# Altium PCB 触摸扩展板.PcbDoc
Units mil, origin at the board's own origin, x right, y up, seen from the top; angles counter-clockwise.
Board outline 984.25 x 1043.31 mil, 2 copper layers (Top Layer, Bottom Layer); 13 components, 10 nets, 46 pads, 27 vias.
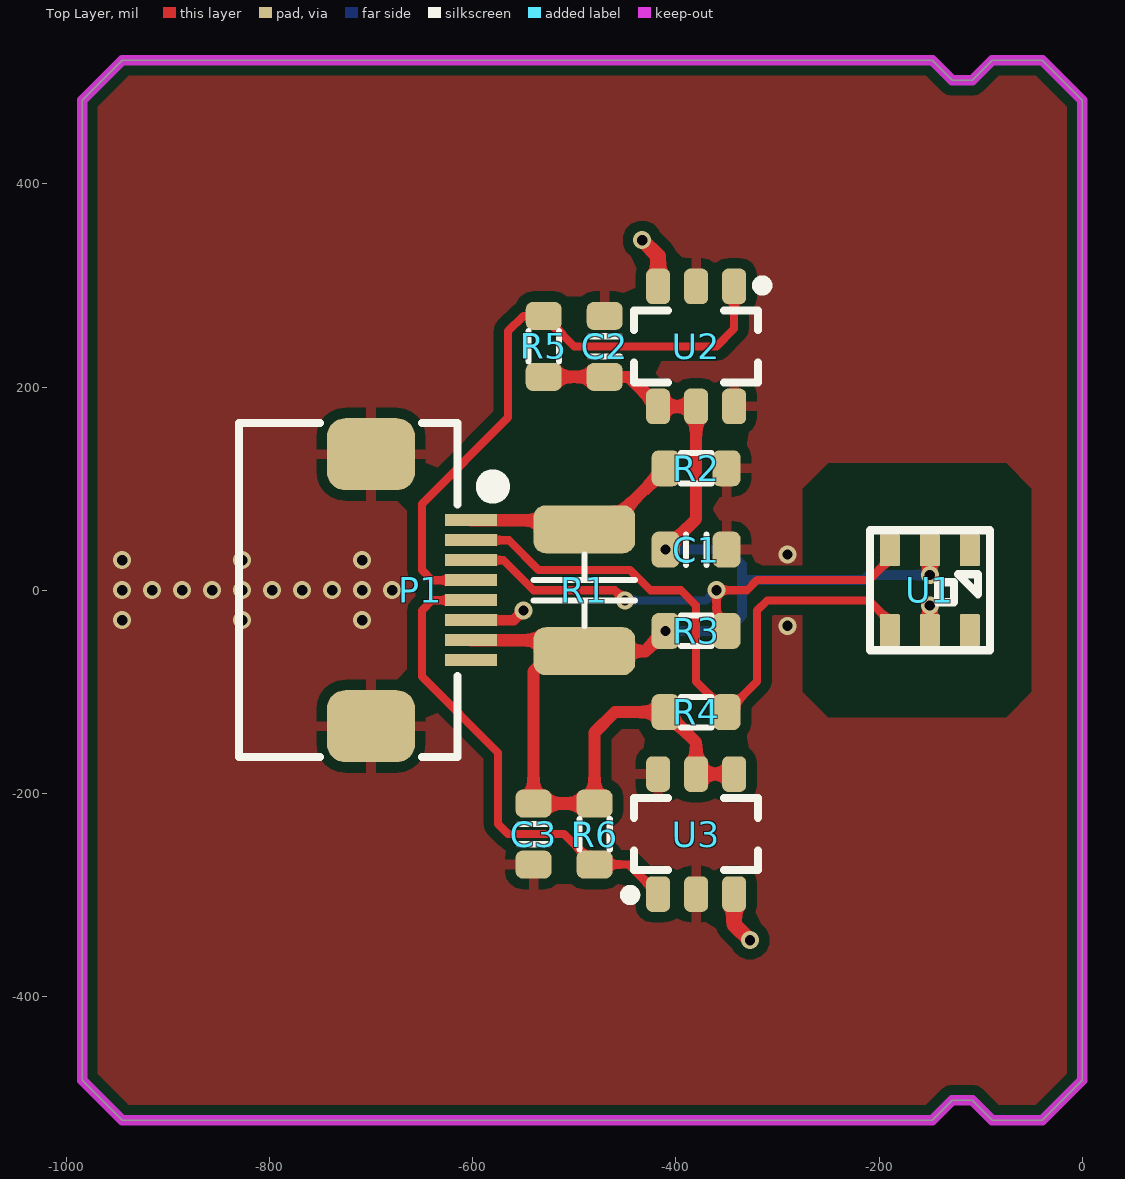
[diagram p0: Top Layer view]
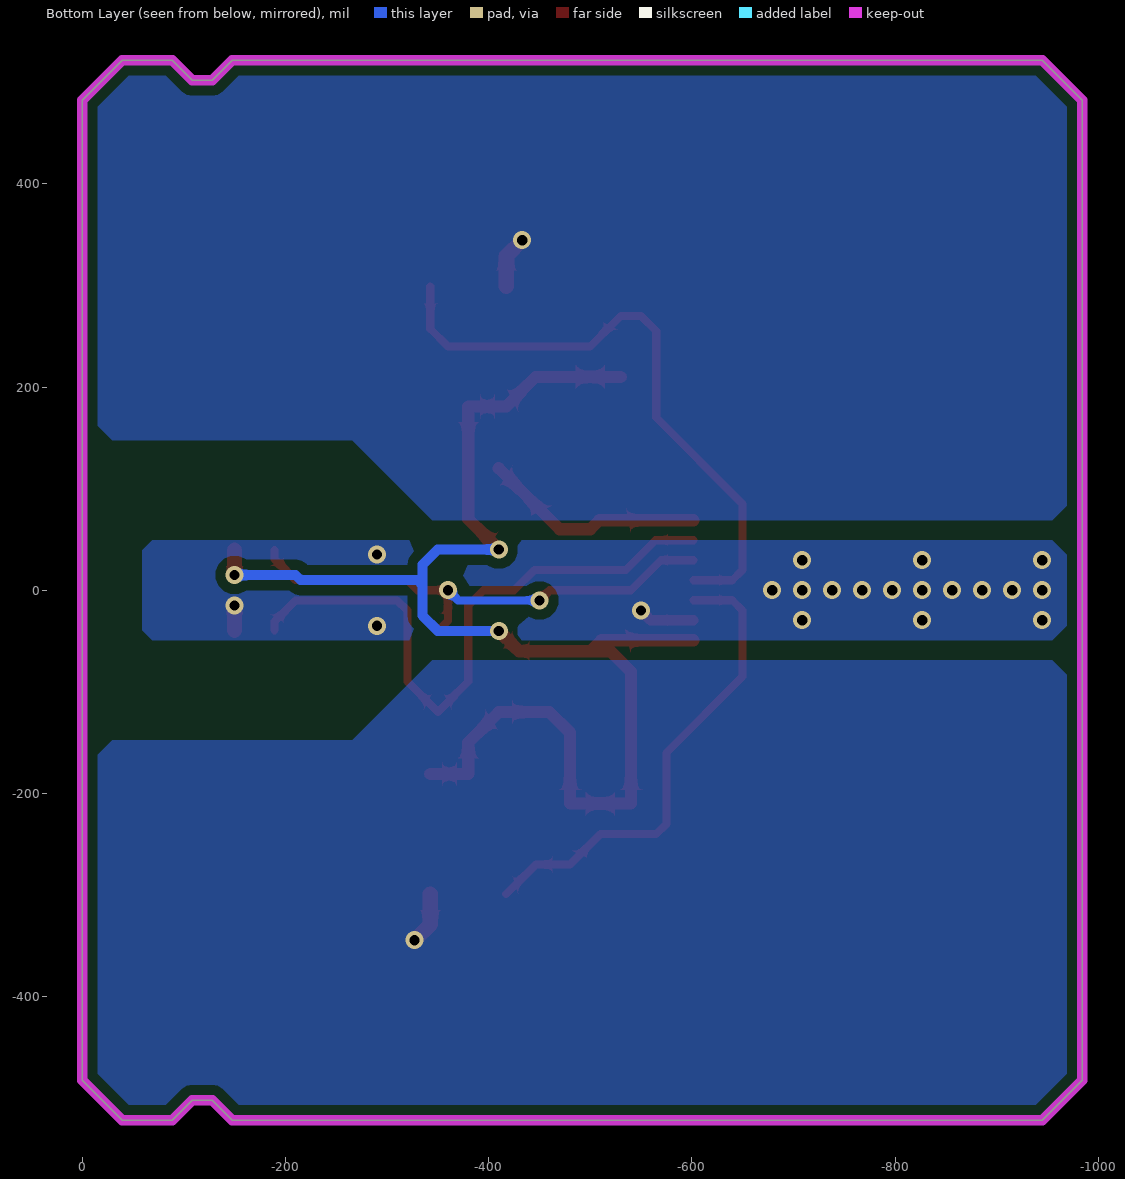
[diagram p1: Bottom Layer view, seen from below]
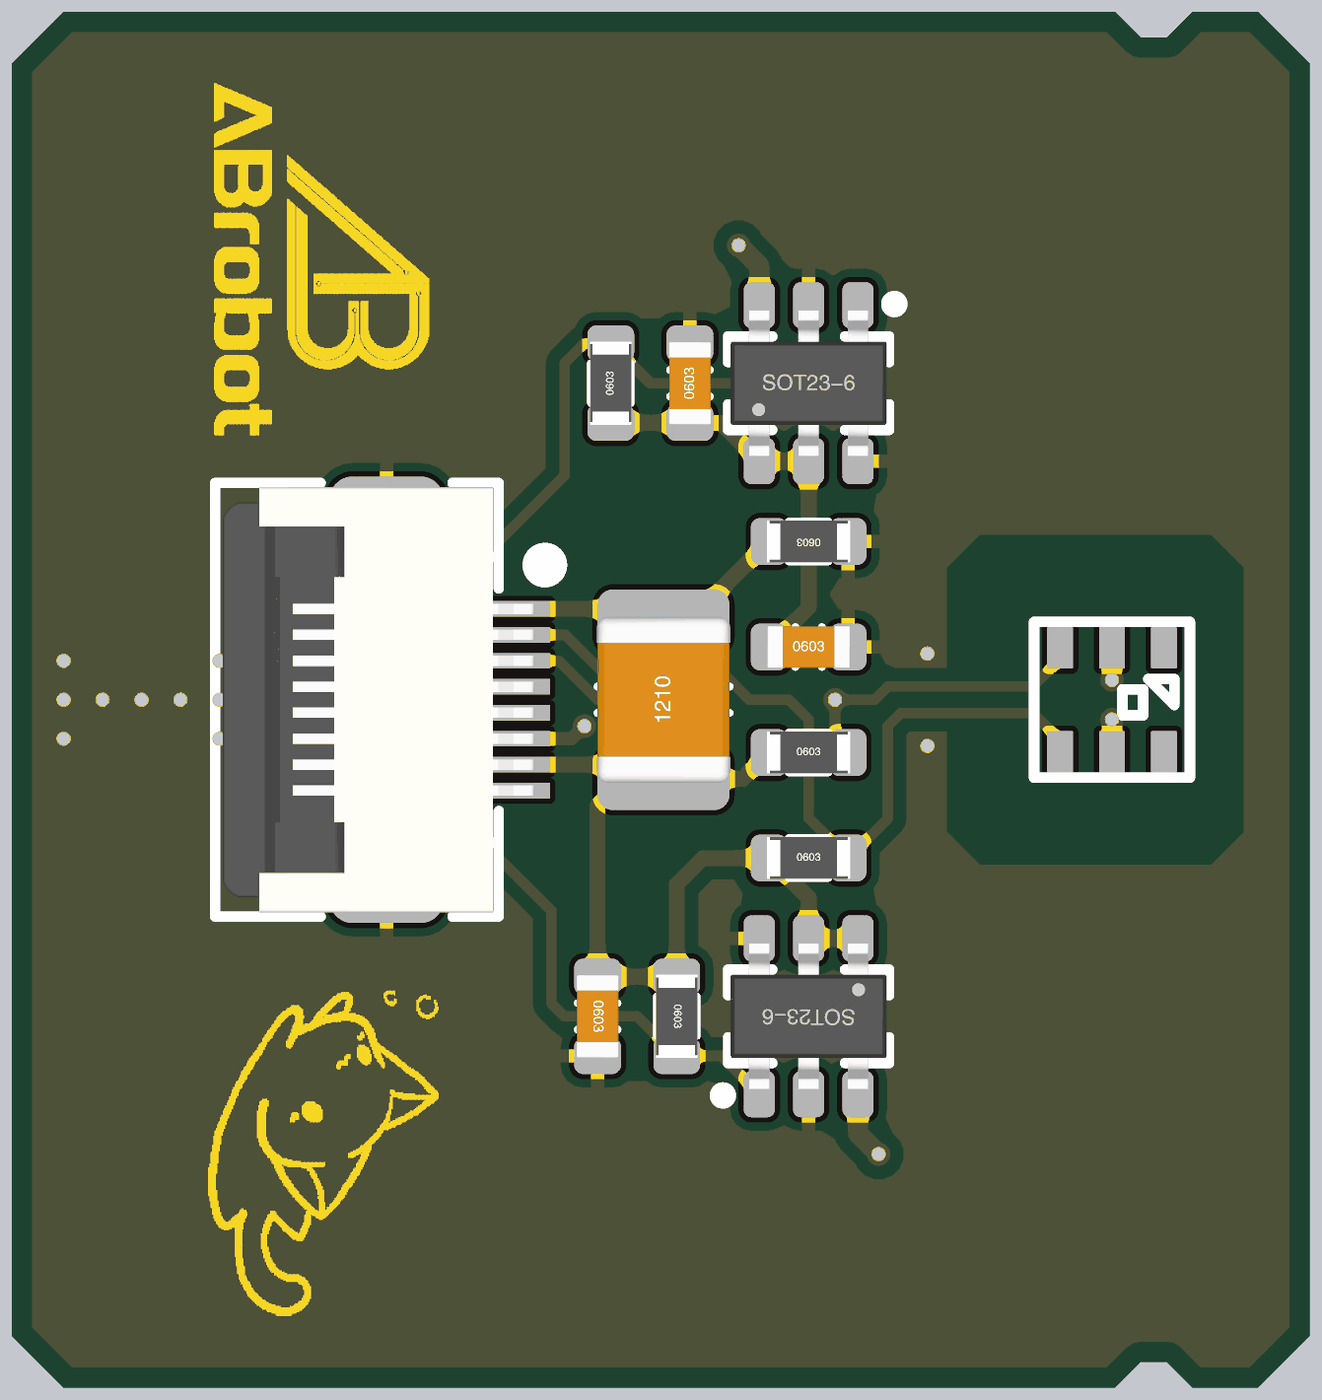
[diagram p2: 3D render of the assembled board from above, using the file's embedded part models]

## Layer stack, top to bottom
Top Solder: solder mask 0.4, Solder Resist, Dk 3.5
Top Layer: signal copper 1.4
Dielectric 1: dielectric 12.6, FR-4, Dk 4.8
Bottom Layer: signal copper 1.4
Bottom Solder: solder mask 0.4, Solder Resist, Dk 3.5

## Board outline
-984.25,-482.28 -944.88,-521.65 -147.64,-521.65 -127.95,-501.97 -108.27,-501.97 -88.58,-521.65 -39.37,-521.65 0,-482.28 0,482.28 -39.37,521.65 -88.58,521.65 -108.27,501.97 -127.95,501.97 -147.64,521.65 -944.88,521.65 -984.25,482.28

## Design rules (kind name [scope] priority, off if disabled: settings)
Clearance Clearance_1 [InPolygon] p1: gap=10 ignorepadtopadclearanceinfootprint=FALSE
Clearance [All] p2: gap=7 ignorepadtopadclearanceinfootprint=FALSE
PlaneConnect PlaneConnect_1 [IsVia] p1: planeconnectstyle=Direct reliefexpansion=20 reliefentries=4 reliefconductorwidth=10 reliefairgap=10
PlaneConnect [All] p2: planeconnectstyle=Relief reliefexpansion=20 reliefentries=4 reliefconductorwidth=10 reliefairgap=10
PolygonConnect PolygonConnect_1 [IsVia] p1: connectstyle=Direct reliefconductorwidth=10 reliefentries=4 polygonreliefangle="90 Angle" airgapwidth=10
PolygonConnect [All] p2: connectstyle=Relief reliefconductorwidth=10 reliefentries=4 polygonreliefangle="90 Angle" airgapwidth=10
RoutingVias [All] p1: holewidth=28 width=50 viastyle="Through Hole" minholewidth=28 minwidth=50 maxholewidth=28 maxwidth=50
SolderMaskExpansion [All] p1: expansion=4 istentingtop=FALSE
Width [All] p1: maxlimit=50 minlimit=8 preferedwidth=10
29 further rules are at their usual default settings.

## Components (designator, comment, footprint, x,y, rotation, side; value= is the part's Value field where it differs from the comment)
C1 "0.1uF" C_0603 -380,40 r0 top value=100pF
C2 "0.1uF" C_0603 -470,240 r90 top value=100pF
C3 "0.1uF" C_0603 -540,-240 r270 top value=100pF
P1 "扩展" "FPC0.5 2H-WS-8P" -700,0 r270 top
R1 "10K" C_1210 -490,0 r90 top value=1K
R2 "10K" R_0603 -380,120 r180 top value=22R
R3 "10K" R_0603 -380,-40 r0 top value=22R
R4 "10K" R_0603 -380,-120 r0 top value=22R
R5 "10K" R_0603 -530,240 r90 top value=22R
R6 "10K" R_0603 -480,-240 r270 top value=22R
U1 "AHT21" AHT21 -150,0 r270 top
U2 "TTP223H" SOT23-6-Y -380,240 r270 top
U3 "TTP223H" SOT23-6-Y -380,-240 r90 top

## Footprints (in the part's own frame and the unit in brackets; to place one, negate y for a bottom-side part, rotate by r counter-clockwise, add the part's x,y. Pads: shape width x height; smd on the part's side, far side on the other; paste and mask are expansions set on the pad)
AHT21 [mm] "温湿度传感器"
  rrect10% 0.8x0.5 smd: 1(-1,1) 2(-1,0) 3(-1,-1) 4(1,-1) 5(1,0) 6(1,1)
  silkscreen extent -1.5,-1.5 1.5,1.5, body extent -1.5,-1.5 1.5,1.5, height 0.8
C_0603 [mm]
  rrect50% 0.7x0.9 smd: 1(-0.762,0) 2(0.762,0)
  silkscreen extent -0.25,-0.38 0.25,0.38, body extent -0.8,-0.41 0.8,0.41, height 0.81
C_1210 [mil]
  rrect50% 47.24x100 smd: 1(-60,0) 2(60,0)
  silkscreen extent -35,-50 35,50, body extent -63,-51 63,51, height 60
"FPC0.5 2H-WS-8P" [mm] "长：8.2mm，宽：5.2mm，高：2mm"
  rrect50% 1.8x2.2 smd: 0(-3.4,0) 0(3.4,0)
  rect 0.3x1.3 smd: 1(-1.75,2.497) 2(-1.25,2.497) 3(-0.75,2.497) 4(-0.25,2.497) 5(0.25,2.497) 6(0.75,2.497) 7(1.25,2.497) 8(1.75,2.497)
  silkscreen extent -4.17,-3.3 4.18,3.23, body extent -4.1,-3.15 4.1,2.85, height 2
R_0603 [mm]
  rrect50% 0.7x0.9 smd: 1(-0.762,0) 2(0.762,0)
  silkscreen extent -0.38,-0.38 0.38,0.38, body extent -0.8,-0.4 0.8,0.4, height 0.4
SOT23-6-Y [mm] "SOT23, 3-Leads, Body 3.1x3.0mm (max), Pitch 0.95mm, IPC Medium Density"
  rrect50% 0.889x0.6 smd: 1(-1.5,0.95) 2(-1.5,0) 3(-1.5,-0.95) 4(1.5,-0.95) 5(1.5,0) 6(1.5,0.95)
  silkscreen extent -1.65,-1.55 0.9,1.78, body extent -1.4,-1.5 1.4,1.5, height 1.15

## Part data
C1 C2 C3: library part Cap, "Capacitor", LatestRevisionDate=17-Jul-2002, LatestRevisionNote="Re-released for DXP Platform.", PackageDescription="Radial Cap, Thru-Hole; 2 Leads; 0.3 in Pin Spacing", PackageReference=RAD-0.3, Published=8-Jun-2000, Publisher="Altium Limited"
P1: library part "Header 8", "Header, 8-Pin", LatestRevisionDate=17-Jul-2002, LatestRevisionNote="Re-released for DXP Platform.", Publisher="Altium Limited"
R1: library part "Res Adj2", "Variable Resistor", LatestRevisionDate=17-Jul-2002, LatestRevisionNote="Re-released for DXP Platform.", PackageDescription="Axial Device, Thru-Hole; 2 Leads; 0.6 in Pin Spacing", PackageReference=AXIAL-0.6, Published=8-Jun-2000, Publisher="Altium Limited", Set Position=0.5
R2 R3 R4 R5 R6: library part 电阻-0402, "Resistor"
U1: "温湿度传感器"
U2 U3: "触摸传感器"

## Via types
v1: diameter 17.72, hole 10, Top Layer to Bottom Layer, tented both sides, 27 vias

## Nets (pads, with @x,y where several pads share a name; then routed paths per layer and width w, separated by ;. In a path a pad name is that pad's centre, name@x,y a point inside that pad or via, vN(x,y) a via of type N, cw(c..) or ccw(c..) an arc to the next point about the centre after c; other vN are vias at no path point)
3V3: C1.1 C2.1 C3.1 P1.7 R1.1 R3.1 R4.1 R5.1 R6.1 U1.2 U2.4 U2.5 U3.4 U3.5 | length 1453.1
  Top Layer w12: P1.7 -510.79,-49.21 -500,-60 R1.1 ; R5.1 C2.1 -446.46,210 U2.4 U2.5 -380,70 v1(-410,40) ; v1(-410,-40) -430,-60 R1.1 ; U3.4 U3.5 -380,-150 R4.1 -460,-120 -480,-140 R6.1 C3.1 -540,-80 -520,-60 R1.1
  Top Layer w15: v1(-150,15) U1.2
  Bottom Layer w10: v1(-410,-40) -350,-40 -335,-25 -335,5 ; v1(-410,40) -350,40 -335,25 -335,10 -335,5 ; v1(-150,15) -210,15 -215,10 -330,10 -335,5
AHT_SCL: P1.3 R3.2 U1.3 | length 498.4
  Top Layer w8: P1.3 -569.53,29.53 -540,0 -460,0 v1(-450,-10) ; R3.2 -360,-30.01 v1(-360,0) -330,0 -320,10 -210,10 -189.37,30.63 U1.3
  Bottom Layer w8: v1(-450,-10) -370,-10 v1(-360,0)
AHT_SDA: P1.2 R4.2 U1.4 | length 630.2
  Top Layer w8: P1.2 -564.21,49.21 -535,20 -445,20 -425,0 -395,0 -380,-15 -380,-90.01 R4.2 -320,-89.99 -320,-20 -310,-10 -210,-10 -189.37,-30.63 U1.4
GND: C1.2 C2.2 C3.2 P1.0 P1.6 R2.1 U1.5 U2.2 U2.6 U3.2 U3.6 | length 80
  Top Layer w10: P1.6 -559.53,-29.53 v1(-550,-20)
  Top Layer w15: U1.5 v1(-150,-15)
  other v1: -290,-35 -944.88,-29.53 -826.77,-29.53 -708.66,-29.53 -944.88,0 -915.35,0 -885.83,0 -856.3,0 -826.77,0 -797.24,0 -767.72,0 -738.19,0 -708.66,0 -679.13,0 -944.88,29.53 -826.77,29.53 -708.66,29.53 -290,35
GPIO12: P1.8
GPIO25: P1.4 R5.2 U2.1 | length 612.6
  Top Layer w8: P1.4 -639.84,9.84 -650,20 -650,85 -565,170 -565,255 -550.01,269.99 R5.2 -500.01,240 -360,240 -342.6,257.4 U2.1
GPIO27: P1.5 R6.2 U3.1 | length 479.8
  Top Layer w8: P1.5 -639.84,-9.84 -650,-20 -650,-85 -575,-160 -575,-230 -565,-240 -509.99,-240 R6.2 -446.46,-269.99 U3.1
GPIO35: P1.1 R1.2 R2.2 | length 220.2
  Top Layer w12: P1.1 -508.9,68.9 -500,60 -469.99,60 R2.2
L: U3.3 | length 51.9
  Top Layer w15: U3.3 -342.6,-328.82 v1(-326.93,-344.49)
R: U2.3 | length 51.9
  Top Layer w15: v1(-433.07,344.49) -417.4,328.82 U2.3
pads on no net: U1.1 U1.6

## Polygon pours and split planes (outlines as drawn)
GND on Bottom Layer "GND_L02_P001" (solid, remove dead copper, pour order 1): -954.72,49.21 -68.9,49.21 -59.06,39.37 -59.06,-39.37 -68.9,-49.21 -954.72,-49.21 -984.25,-19.69 -984.25,19.68
L on Bottom Layer "L_L02_P002" (solid, remove dead copper, pour order 2): -954.72,-68.9 -984.25,-98.43 -984.25,-482.28 -944.88,-521.65 -39.37,-521.65 0,-482.28 0,-177.17 -29.53,-147.64 -265.75,-147.64 -344.49,-68.9
R on Bottom Layer "R_L02_P003" (solid, remove dead copper, pour order 3): -954.72,68.9 -984.25,98.43 -984.25,482.28 -944.88,521.65 -39.37,521.65 0,482.28 0,177.17 -29.53,147.64 -265.75,147.64 -344.49,68.9
GND on Top Layer "GND_L01_P000" (solid, remove dead copper, pour order 0): -984.25,521.65 0,521.65 0,-521.65 -984.25,-521.65

## Keep-outs
Keep-Out Layer:
  the board outline again, w10

## Other copper
Top Layer:
  pour cut-out: -275,100 -250,125 -75,125 -50,100 -50,-100 -75,-125 -250,-125 -275,-100

## Silkscreen, mask and mechanical layers (free items; w line width, h text height)
Top Solder:
  drawing of 2114 lines, arcs and shapes, not listed
Bottom Solder:
  text "L  R" at -832.8,-452.75 h600 r270
Mechanical 1:
  lines w10: -1063.31,-461.65 -1043.31,-521.65 ; -1063.31,481.34 -1043.31,541.34 ; -1053.31,-521.65 -1033.31,-521.65 ; -1053.31,541.34 -1033.31,541.34 ; -1043.31,-167.88 -1043.31,-521.65 ; -1043.31,187.56 -1043.31,541.34 ; -1023.31,-461.65 -1043.31,-521.65 ; -1023.31,481.34 -1043.31,541.34 ; -984.25,-571.02 -984.25,-551.02 ; -924.25,-581.02 -984.25,-561.02 ; -924.25,-541.02 -984.25,-561.02 ; -656.72,-561.02 -984.25,-561.02 ; -327.53,-561.02 0,-561.02 ; -60,-581.02 0,-561.02 ; -60,-541.02 0,-561.02 ; 0,-571.02 0,-551.02 ; -984.25,-482.28 -984.25,482.28 -944.88,521.65 -147.64,521.65 -127.95,501.97 -108.27,501.97 -88.58,521.65 -39.37,521.65 0,482.28 0,-482.28 -39.37,-521.65 -88.58,-521.65 -108.27,-501.97 -127.95,-501.97 -147.64,-521.65 -944.88,-521.65 -984.25,-482.28
  text "1062.992 (mil)" at -1018.11,-157.88 h60 r90
  text "984.252 (mil)" at -646.72,-586.22 h60